# Altium PCB PCB2.PcbDoc
Units mm, origin at the board's own origin, x right, y up, seen from the top; angles counter-clockwise.
Board outline 25.01 x 3.9 mm, 4 copper layers (Top Layer, Signal Layer 1, Internal Plane 1, Bottom Layer), stack 1.48 mm thick; 10 components, 7 nets, 40 pads, 15 vias.
Unrouted connection lines stored in the file: 1.
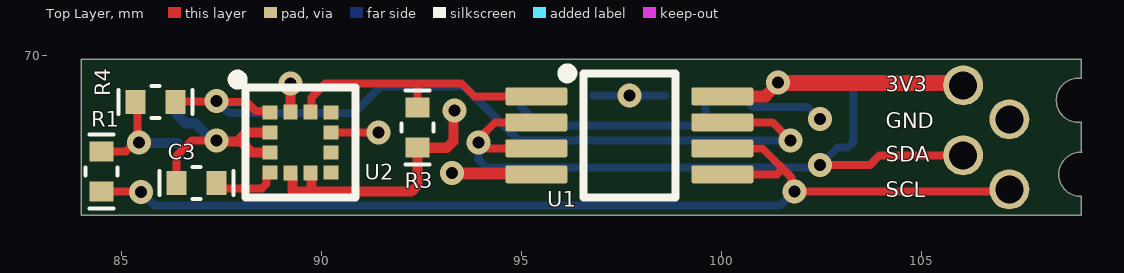
[diagram p0: Top Layer view]
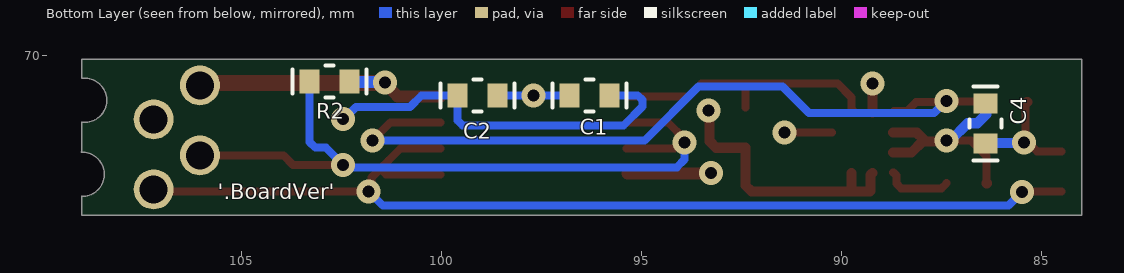
[diagram p1: Bottom Layer view, seen from below]
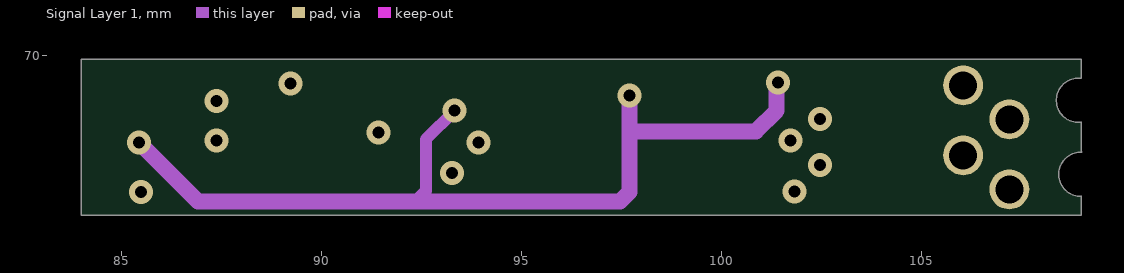
[diagram p2: Signal Layer 1]
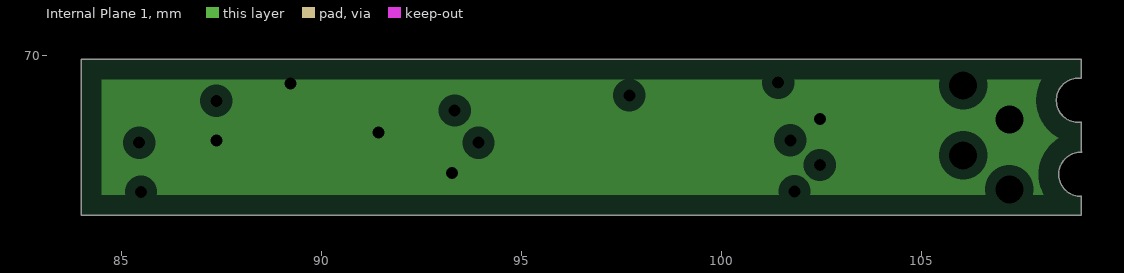
[diagram p3: Internal Plane 1, clearances drawn from the general rule]
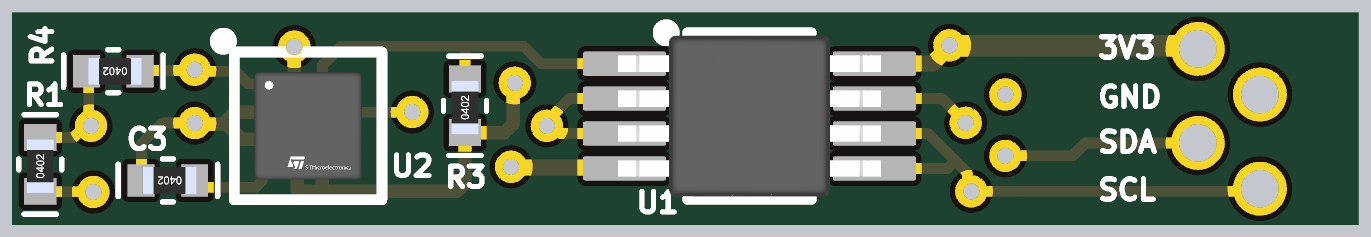
[diagram p4: 3D render of the assembled board from above, using the file's embedded part models]
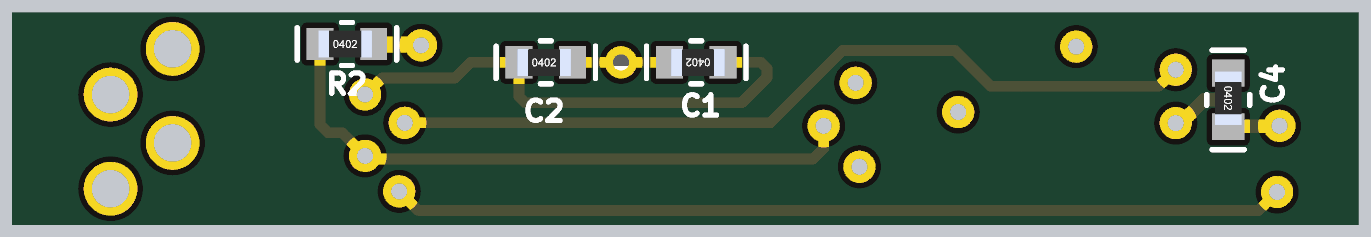
[diagram p5: 3D render of the assembled board from below, using the file's embedded part models]

## Layer stack, top to bottom
Top Solder: solder mask 0.01, Solder Resist, Dk 3.5
Top Layer: signal copper 0.035
Dielectric1: core 0.32, FR-4, Dk 4.8
Signal Layer 1: signal copper 0.035
Dielectric2: core 0.7, FR-4, Dk 4.8
Internal Plane 1: plane copper 0.035, net GND
Dielectric3: core 0.32, FR-4, Dk 4.8
Bottom Layer: signal copper 0.035
Bottom Solder: solder mask 0.01, Solder Resist, Dk 3.5

## Board outline
84,66 84,69.9 109,69.9 109,69.425 ccw(c108.93,68.875) 109,68.325 109,67.585 109.01,67.575 ccw(c108.985,67.025) 109,66.475 109,66

## Design rules (kind name [scope] priority, off if disabled: settings)
Clearance [All] p1: gap=0.254 ignorepadtopadclearanceinfootprint=FALSE except(0.125: Arc-Arc Arc-Track Arc-SMDPad Track-Track Track-SMDPad; 0.15: SMDPad-SMDPad; 0.2: Arc-THPad Arc-Via Arc-Fill Arc-Poly Arc-Region Arc-Text Arc-Hole Track-THPad Track-Via Track-Fill Track-Poly Track-Region Track-Text Track-Hole SMDPad-Text THPad-Text Via-Via Via-Text Fill-Text Poly-Text Region-Text)
HoleSize [All] p1: absolutevalues=TRUE maxlimit=6 minlimit=0.3 maxpercent=80.000 minpercent=20.000
MinimumSolderMaskSliver [All] p1: minsoldermaskwidth=0.1
PlaneClearance [All] p1: clearance=0.254
PlaneConnect [All] p1: planeconnectstyle=Relief reliefexpansion=0.254 reliefentries=4 reliefconductorwidth=0.254 reliefairgap=0.254
PolygonConnect [All] p1: connectstyle=Relief reliefconductorwidth=0.15 reliefentries=4 polygonreliefangle="90 Angle" airgapwidth=0.15
RoutingVias [All] p1: holewidth=0.711 width=1.27 viastyle="Through Hole" minholewidth=0.1 minwidth=0.1 maxholewidth=1 maxwidth=1.5
SilkToSilkClearance [All] p1: silktosilkclearance=0.01
SilkToSolderMaskClearance [IsPad] p1: minsilkscreentomaskgap=0.01 clearancetoexposedcopper=TRUE
SolderMaskExpansion [All] p1: expansion=0.102 istentingtop=FALSE
Width [All] p1: maxlimit=2 minlimit=0.2 preferedwidth=0.254 minimp=50.000000 maximp=50.000000 favimp=50.000000
24 further rules are at their usual default settings.

## Classes and differential pairs
component class Sheet2: C1 C2 C3 C4 R1 R3 R4 U1 U2

## Components (designator, comment, footprint, x,y, rotation, side; value= is the part's Value field where it differs from the comment)
C1 "K10-79" SMD_0402 95.8,69 r0 bottom value=100n
C2 "K10-79" SMD_0402 99.6,69 r180 bottom value=1u
C3 "K10-79" SMD_0402 87.376,66.802 r180 top value=100n
C4 "K10-79" SMD_0402 86.4,68.8 r270 bottom value=100n
R1 "OSM R1-8" SMD_0402 84.5,66.6 r90 top value=240R
R2 "OSM R1-8" SMD_0402 103.302,69.342 r180 bottom value=240R
R3 "OSM R1-8" SMD_0402 92.405,67.691 r90 top value=10K
R4 "OSM R1-8" SMD_0402 86.36,68.834 r180 top value=10K
U1 "P82B96DGKR" DGK0008A_M 97.7,68 r0 top
U2 "LIS3MDLTR" FP-VFLGA-12-8365767-MFG 89.484,67.818 r0 top

## Footprints (in the part's own frame and the unit in brackets; to place one, negate y for a bottom-side part, rotate by r counter-clockwise, add the part's x,y. Pads: shape width x height; smd on the part's side, far side on the other; paste and mask are expansions set on the pad)
DGK0008A_M [mm] "TSOP, 8-Leads, Body 3.1x3.1mm, Pitch 0.65mm, IPC Low Density"
  rrect22% 1.55x0.45 smd: 1(-2.325,0.975) 2(-2.325,0.325) 3(-2.325,-0.325) 4(-2.325,-0.975) 5(2.325,-0.975) 6(2.325,-0.325) 7(2.325,0.325) 8(2.325,0.975)
  silkscreen extent -1.67,-1.55 1.15,1.67, body extent -2.45,-1.5 2.45,1.5, height 0.94
FP-VFLGA-12-8365767-MFG [mm]
  rect 0.375x0.35 smd paste+0 mask+0: 1(-0.763,0.75) 2(-0.763,0.25) 3(-0.763,-0.25) 4(-0.763,-0.75) 7(0.763,-0.75) 8(0.763,-0.25) 9(0.763,0.25) 10(0.763,0.75)
  rect 0.35x0.375 smd paste+0 mask+0: 5(-0.25,-0.763) 6(0.25,-0.763) 11(0.25,0.763) 12(-0.25,0.763)
  silkscreen extent -1.7,-1.38 1.38,1.7, body extent -1.58,-1.58 1.58,1.58, height 0.25
SMD_0402 [mm]
  rect 0.5x0.6 smd: 1(0,0) 2(1,0)
  silkscreen extent -0.43,-0.4 1.43,0.4, body extent -0.03,-0.25 0.97,0.25, height 0.34

## Part data
C1 C2 C3 C4: library part Capacitor, "Capacitor", Назначение=SMD-конденсатор, Наименование=К10-79, Напряжение=В, Потребление, Вт=0, Точность=%
R1 R2 R3 R4: library part Resistor, "Resistor", Назначение=SMD-резистор, Наименование="ОСМ Р1-12", Потребление, Вт=0,001, Точность=%
U1: library part CMP-0314-00301-2, "Dual Bidirectional Bus Buffer, 2 Channel Width, 2.0 to 15.0 V, -40 to 85 degC, 8-pin MSOP (DGK), Green (RoHS & no Sb/Br)", 5V Tolerant I/O=Yes, Manufacturer="Texas Instruments", Master Side I2C Bus Capacitance Supported(pF)=400, Channel Width=2, Code_JEDEC=MO-187-AA, ComponentLink1Description=Datasheet, ComponentLink1URL=http://www.ti.com/general/docs/lit/getliterature.tsp?genericPartNumber=P82B96&fileType=pdf, ComponentLink2Description="Package Specification", ComponentLink2URL=http://www.ti.com/litv/pdf/msoi002j, DatasheetVersion=SCPS144B, Eco-Plan="Green (RoHS & no Sb/Br)", Max Frequency(kHz)=400, Mounting Technology="Surface Mount", No. of Outputs=2, Open Drain I/O Type=Yes, PackageDescription="8-Pin Thin Small Outline Package 3 x 3 mm Body ,0.65 mm Pitch", PackageReference=DGK0008A, PackageVersion="revE, May-2006", PartNumber=P82B96DGKR, Slave Side I2C Bus Capacitance Supported(pF)=400, SubFamily="I2C Hub, Buffer, Repeater", Vcc range(V)="2.0 to 15.0", VCC(Max)(V)=15, VCC(Min)(V)=2
U2: library part CMP-2000-07463-2, "SENSOR MR I2C/SPI 12LGA", Manufacturer=STMicroelectronics, Max Supply Voltage=3.6V, Min Supply Voltage=1.71V, Operating Supply Current=40-270uA, Package=VFLGA-12-8365767, Temperature="-40°C to +85°C", Temperature Range High=+85°C, Temperature Range Low=-40°C, Automotive=No, Category=IC, ComponentLink2Description=Datasheet, ComponentLink2URL=https://www.st.com/resource/en/datasheet/lis3mdl.pdf, Device Class L1=Sensors, Device Class L2="Magnetic Sensors", Device Class L3=unset, Digikey Description="SENSOR MR I2C/SPI 12LGA", Footprint Url=https://www.st.com/content/ccc/resource/technical/document/technical_note/73/17/9c/16/dd/96/4a/01/CD00134799.pdf/files/CD00134799.pdf/jcr:content/translations/en.CD00134799.pdf, Height=1mm, Lead Free=Yes, Manufacturer Part Number=LIS3MDLTR, Mouser Description="Board Mount Hall Effect / Magnetic Sensors Ultra Lo-Pwr Hi Perf 3-Axis 1.9-3.6V", Octopart=https://octopart.com/lis3mdltr-stmicroelectronics-29403125, RoHS=TRUE, Sensing Method=Magnetic, Sensor Output=I2C,SPI

## Free pads (board coordinates)
  round 1 hole 0.7: 6(106.045,69.25) 7(107.2,68.4) 8(106.045,67.5) 8(107.2,66.648)

## Via types
v1: diameter 0.6, hole 0.3, Top Layer to Bottom Layer, 15 vias

## Nets (pads, with @x,y where several pads share a name; then routed paths per layer and width w, separated by ;. In a path a pad name is that pad's centre, name@x,y a point inside that pad or via, vN(x,y) a via of type N, cw(c..) or ccw(c..) an arc to the next point about the centre after c; other vN are vias at no path point)
3V3: C1.2 C2.2 C4.2 pad.6 R1.2 R2.2 R3.1 R4.2 U1.8 U2.5 U2.6 | length 41.4
  Top Layer w0.2: R1.2 85.119,67.6 85.337,67.818 v1(85.446,67.818) 85.403,67.861 85.403,68.791 R4.2@85.38,68.814 ; v1@101.422,69.297 v1(101.422,69.317) v1@101.431,69.308
  Top Layer w0.25: U2.5 89.284,67.005 89.284,66.613 89.297,66.6 92.259,66.6 92.405,66.746 R3.1 ; 89.75,66.65 U2.6@89.75,67.055
  Top Layer w0.254: R4.2 R4.2@85.38,68.814 ; R3.1 93.141,67.691 93.302,67.852 93.302,68.588 v1(93.333,68.619)
  Top Layer w0.3: U1.8 101.1,68.975 v1@101.422,69.297
  Top Layer w0.4: v1@101.431,69.308 pad.6@106.045,69.308
  Signal Layer 1 w0.3: 92.349,66.345 92.613,66.609 92.613,67.899 v1(93.333,68.619)
  Signal Layer 1 w0.4: v1@85.448,67.816 86.919,66.345 92.349,66.345 97.466,66.345 97.7,66.579 97.7,68.1 ; v1(97.7,69) 97.7,68.1 ; v1(101.422,69.317) 101.384,69.278 101.384,68.62 100.864,68.1 97.7,68.1
  Bottom Layer w0.2: C1.2 v1(97.7,69) C2.2
  Bottom Layer w0.254: v1(85.446,67.818) 85.455,67.809 86.391,67.809 C4.2 ; R2.2@102.276,69.367 R2.2
  Bottom Layer w0.3: v1(101.422,69.317) 101.435,69.329 102.238,69.329 R2.2@102.276,69.367
GND: C1.1 C2.1 C3.2 C4.1 pad.7 U1.4 U2.2 U2.3 U2.9 U2.12 | length 19.4
  Top Layer w0.2: C3.2@86.383,66.809 86.383,67.483 86.769,67.869 v1(87.376,67.869) v1@87.395,67.85 ; U2.9 90.25,68.071 91.421,68.071 v1(91.425,68.075) ; v1(93.263,67.056) v1@93.278,67.041 ; U1.4@95.359,67.041 U1.4
  Top Layer w0.25: v1@87.395,67.85 87.976,67.85 88.258,67.568 U2.3
  Top Layer w0.254: C3.2 C3.2@86.383,66.809 ; 87.976,67.85 87.976,67.919 88.125,68.068 U2.2 ; U2.12@89.228,68.573 v1(89.228,69.292)
  Top Layer w0.3: v1@93.278,67.041 U1.4@95.359,67.041 ; v1(102.464,68.402) v1(102.464,68.402) ; pad.7@107.111,68.401 pad.7@107.112,68.4
  Bottom Layer w0.2: C1.1 95.1,69 94.983,68.883 94.983,68.717 95.45,68.25 99.483,68.25 99.6,68.367 C2.1 100.5,69 100.791,68.709 102.146,68.709 102.453,68.402 v1(102.464,68.402)
  Bottom Layer w0.254: C4.1@86.45,68.8 C4.1 86.385,68.785 86.385,68.526 86.609,68.302 86.849,68.302 87.282,67.869 v1(87.376,67.869) v1@87.376,67.874
I2C_SCL: R4.1 U1.7 U2.1 | length 19.7
  Top Layer w0.2: R4.1@86.374,68.848 v1@87.362,68.848 ; v1@87.404,68.834 88.138,68.834 88.369,68.603 88.687,68.603 U2.1 ; U1.7 101.281,68.325 101.725,67.882 v1(101.725,67.874)
  Top Layer w0.254: R4.1 R4.1@86.374,68.848 ; v1@87.362,68.848 v1(87.376,68.862) v1@87.404,68.834
  Bottom Layer w0.2: v1(87.376,68.862) 87.386,68.862 87.693,68.555 90.818,68.555 91.482,69.219 93.581,69.219 94.926,67.874 v1(101.725,67.874)
I2C_SDA: R3.2 U1.1 U2.11 | length 6.7
  Top Layer w0.2: U2.11@89.735,68.651 89.752,68.668 89.752,68.949 90.103,69.3 92.405,69.3 93.5,69.3 93.825,68.975 U1.1 ; R3.2 92.405,69.205
MSCL: pad.8@107.2,66.648 R1.1 U1.5 U1.6 | length 26.9
  Top Layer w0.2: R1.1 84.507,66.593 85.483,66.593 v1(85.49,66.587) ; U1.5 101.391,67.025 101.519,67.153 ; U1.6 101.025,67.675 101.323,67.377 ; 101.337,67.363 101.533,67.167 101.752,66.948 101.752,66.675 v1(101.829,66.599) ; v1(101.829,66.599) pad.8@107.158,66.6
  Bottom Layer w0.2: v1(85.49,66.587) 85.833,66.243 101.473,66.243 v1(101.829,66.599)
MSDA: pad.8@106.045,67.5 R2.1 U1.2 U1.3 | length 18.5
  Top Layer w0.2: U1.3 94.18,67.675 94.037,67.818 v1(93.929,67.818) 93.929,67.905 94.349,68.325 U1.2 ; v1(102.464,67.259) 103.716,67.259 103.956,67.5 pad.8@106.045,67.5
  Bottom Layer w0.2: v1(93.929,67.818) 93.929,67.395 94.124,67.2 102.404,67.2 v1(102.464,67.259) 102.896,67.692 103.158,67.692 103.302,67.835 R2.1
NetC3_1: C3.1 U2.4 | length 1.7
  Top Layer w0.2: C3.1 87.502,66.676 88.517,66.676 88.634,66.793 88.634,66.993 88.709,67.068 U2.4
pads on no net: U2.7 U2.8 U2.10

## Polygon pours and split planes (outlines as drawn)
GND on Internal Plane 1 (split plane): 107.946,69.282 107.901,69.151 107.874,69.014 107.865,68.875 107.874,68.736 107.901,68.599 107.946,68.468 108.007,68.343 108.085,68.227 108.177,68.122 108.281,68.03 108.397,67.953 108.438,67.933 108.34,67.867 108.235,67.775 108.144,67.671 108.067,67.556 108.005,67.431 107.961,67.3 107.934,67.164 107.925,67.025 107.934,66.887 107.961,66.751 108.005,66.619 108.059,66.51 84.51,66.51 84.51,69.39 107.999,69.39

## Silkscreen, mask and mechanical layers (free items; w line width, h text height)
Top Overlay:
  text "3V3" at 104.115,69.088 h0.38
  text "GND" at 104.115,68.174 h0.38
  text "SDA" at 104.115,67.335 h0.38
  text "SCL" at 104.115,66.446 h0.38
Bottom Overlay:
  text "'.BoardVer'" at 105.598,66.402 h0.38
Mechanical 1:
  lines w0.254: 109,67.585 109,68.325 cw(c108.93,68.875) 109,69.425 109,69.9 84,69.9 84,66 109,66 109,66.475 cw(c108.985,67.025) 109.01,67.575